# EAGLE board proxmark3 (EAGLE 5.06), part 1 of 2
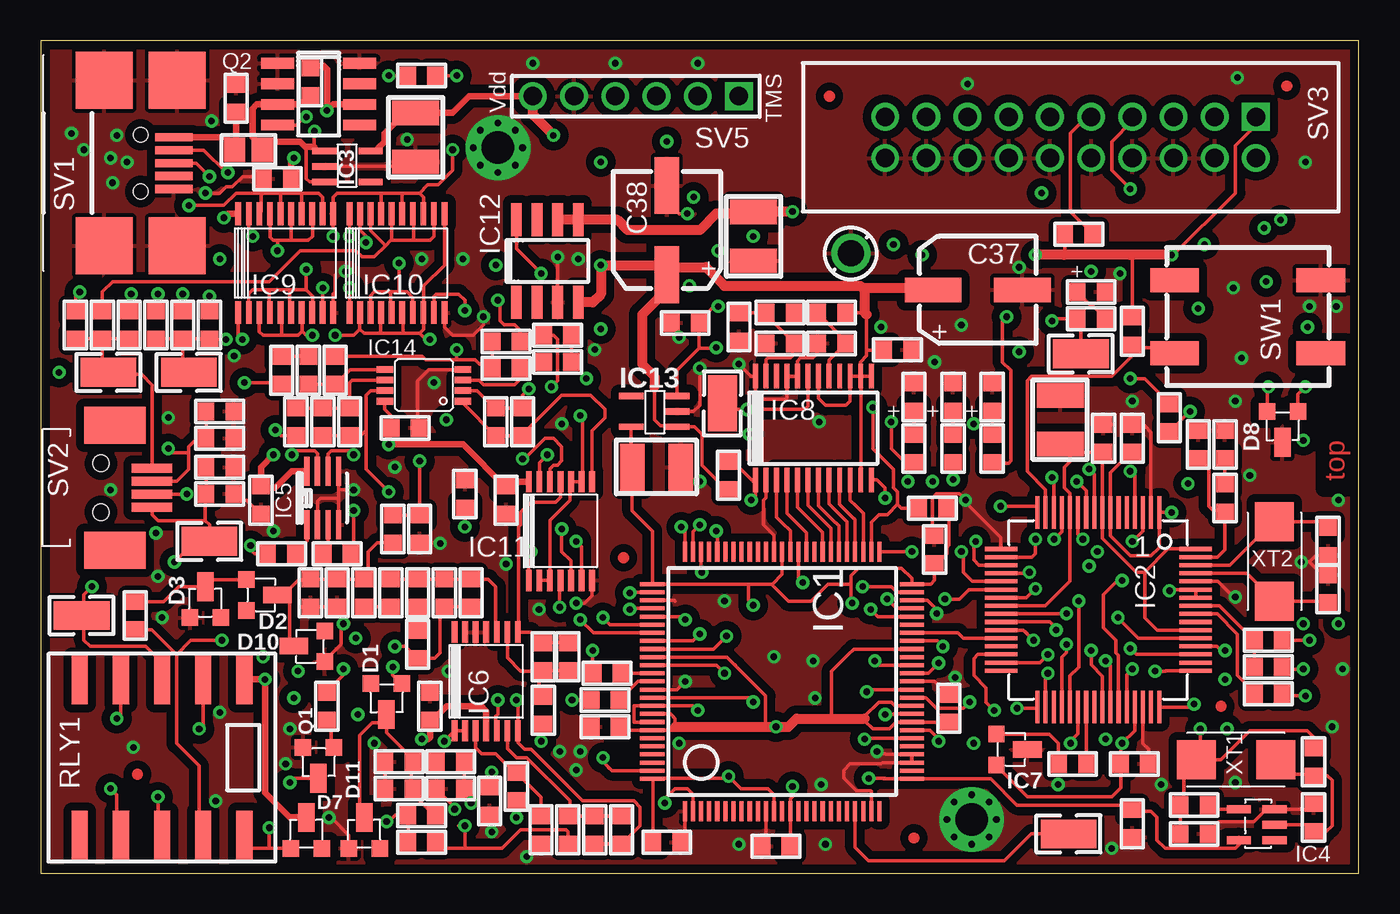
[diagram p0: board, top side]
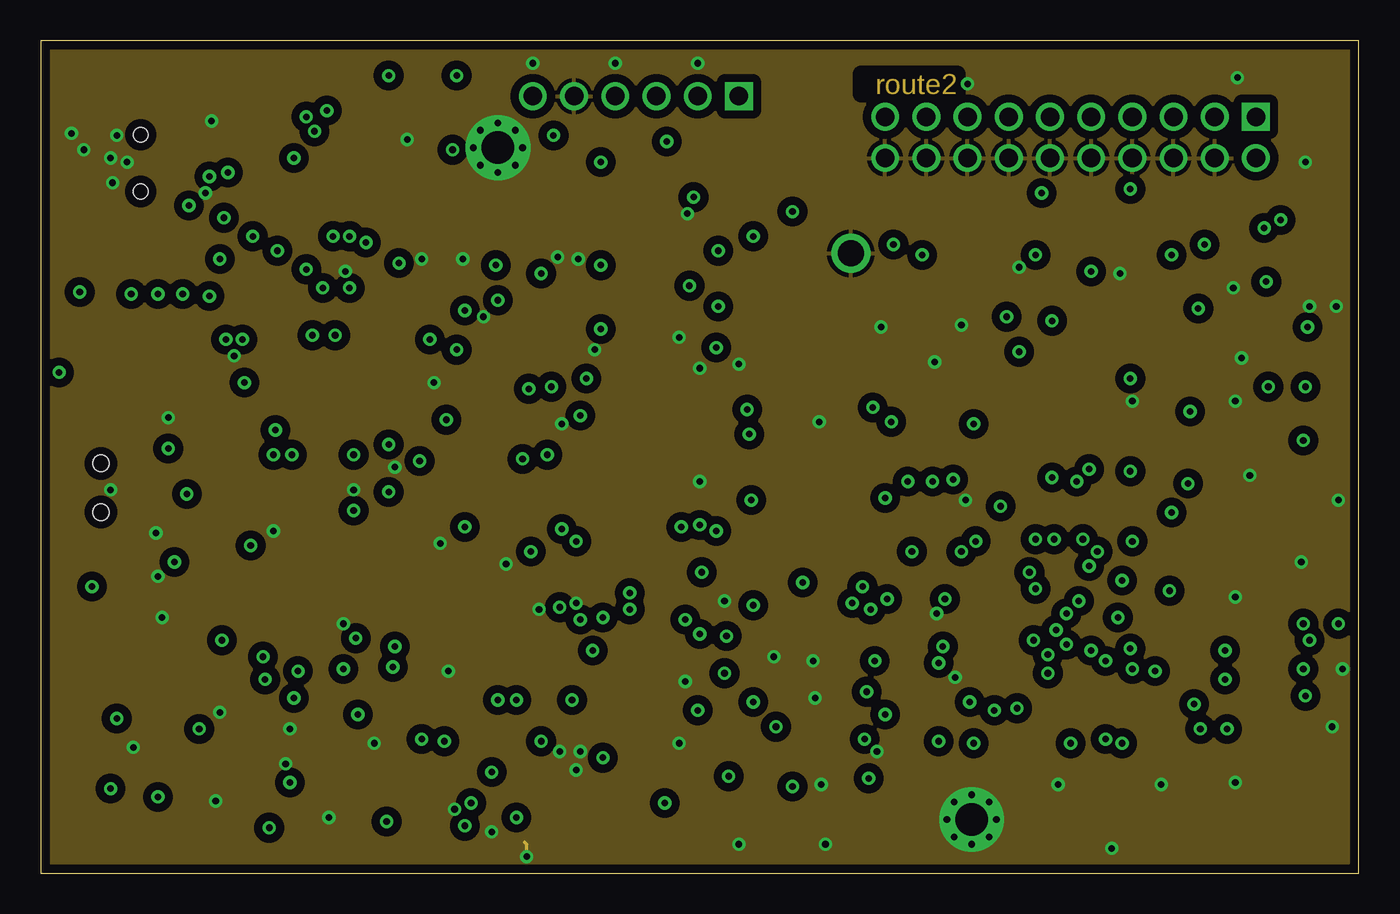
[diagram p1: board, inner layer Route2]
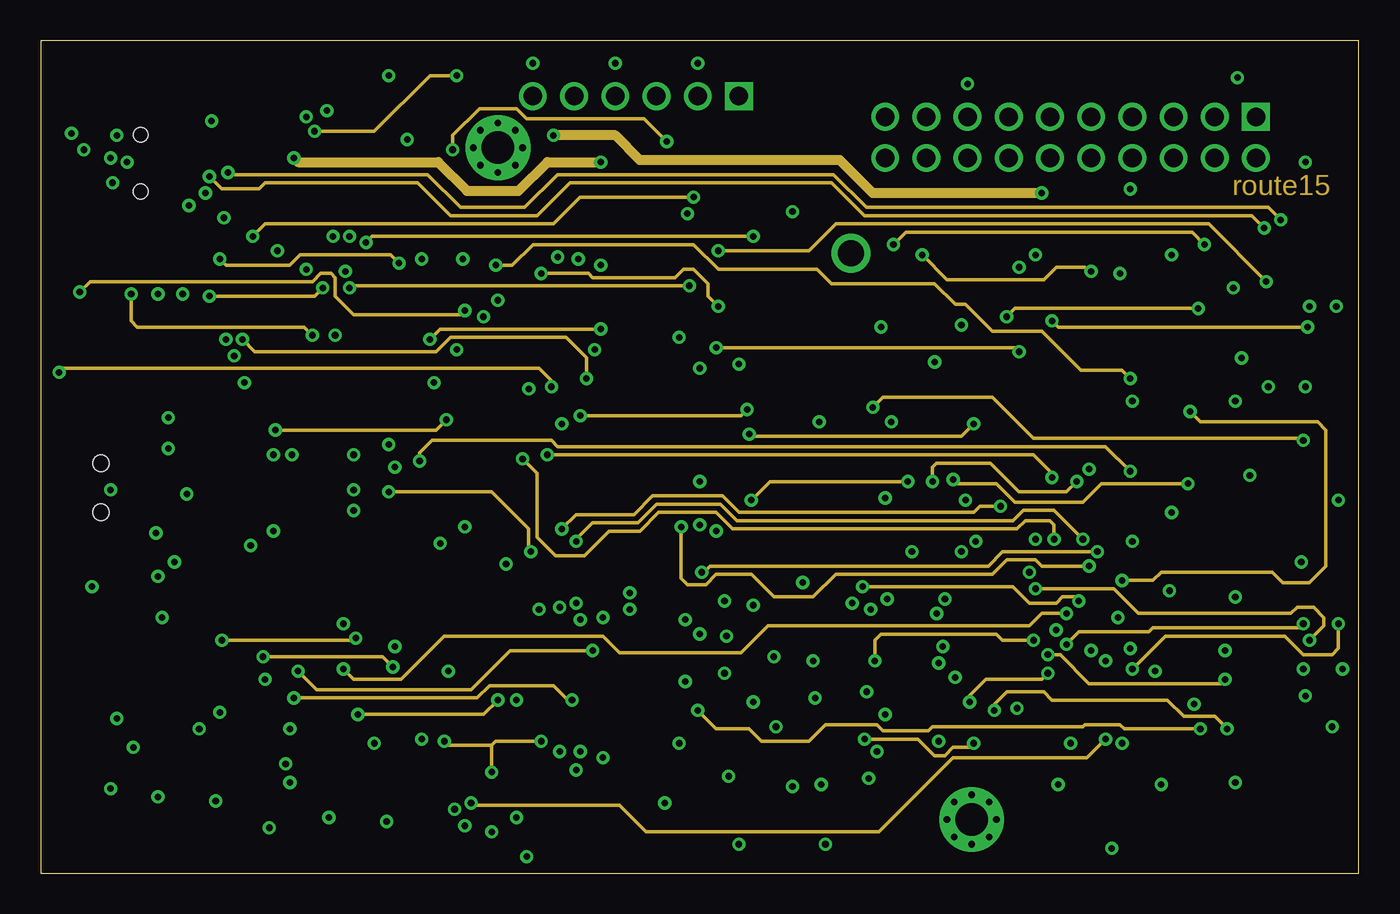
[diagram p2: board, inner layer Route15]
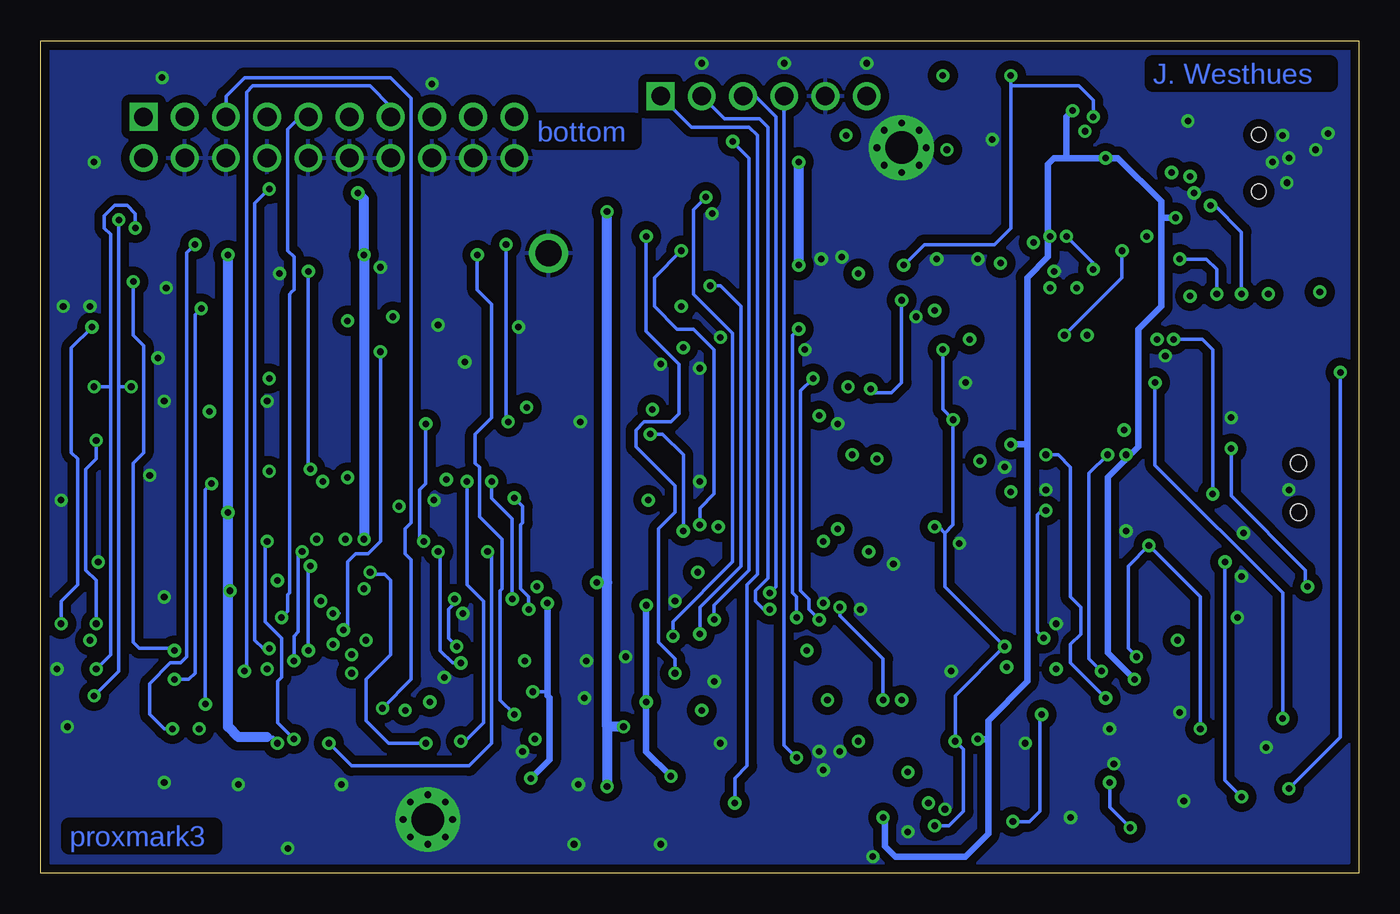
[diagram p3: board, bottom side, seen from below]

Size 81.28 x 51.31 mm. Coordinates in mm from the lower left corner, seen from the top.
Outline: 81.28,0 81.28,51.31 0,51.31 0,0 81.28,0
Copper layers (1*2*15*16): Top 0.0254mm / dielectric 0.508mm / Route2 0.0254mm / dielectric 0.508mm / Route15 0.0254mm / dielectric 0.508mm / Bottom 0.0254mm
Design rules "default *": minimum track width 8mil, minimum drill 16mil, track to track 8mil, track to pad 8mil, pad to pad 8mil, via to via 8mil, smd to smd 0mil, copper to edge 10mil, drill to drill 8mil, minimum pad ring 10mil, minimum via ring 8mil, stop-mask expansion 2mil, vias tented up to drill 16mil, thermal gap 10mil

## Footprints (pad centres in the part's own frame; a part is rotated, then mirrored left to right if it is on the bottom)
RLC_0603 = smd 1 x 1.1: 1 -0.85,0; 2 0.85,0
RLC_1210 = smd 1.5 x 2.9: 1 -1.5,0; 2 1.5,0
CAPCAITOR-ELECTROLYTIC-ALCHIP-MZA-F80 = smd 3.5 x 1.5: + 2.75,0; - -2.75,0
SOT23-3LEAD = smd 1.016 x 1.016: 1 -0.94,-0.762; 2 0.965,-0.762 | smd 1.016 x 1.778: 3 0.013,1.143
LED_0603 = smd 1 x 1.1: + -0.85,0; - 0.85,0
VQFP-100 = smd 1.25 x 0.25: 1 -8,6; 2 -8,5.5; 3 -8,5; 4 -8,4.5; 5 -8,4; 6 -8,3.5; 7 -8,3; 8 -8,2.5; 9 -8,2; 10 -8,1.5; 11 -8,1; 12 -8,0.5; 13 -8,0; 14 -8,-0.5; 15 -8,-1; 16 -8,-1.5; 17 -8,-2; 18 -8,-2.5; 19 -8,-3; 20 -8,-3.5; 21 -8,-4; 22 -8,-4.5; 23 -8,-5; 24 -8,-5.5; 25 -8,-6; 51 8,-6; 52 8,-5.5; 53 8,-5; 54 8,-4.5; 55 8,-4; 56 8,-3.5; 57 8,-3; 58 8,-2.5; 59 8,-2; 60 8,-1.5; 61 8,-1; 62 8,-0.5; 63 8,0; 64 8,0.5; 65 8,1; 66 8,1.5; 67 8,2; 68 8,2.5; 69 8,3; 70 8,3.5; 71 8,4; 72 8,4.5; 73 8,5; 74 8,5.5; 75 8,6 | smd 0.25 x 1.5: 26 -6,-8; 27 -5.5,-8; 28 -5,-8; 29 -4.5,-8; 30 -4,-8; 31 -3.5,-8; 32 -3,-8; 33 -2.5,-8; 34 -2,-8; 35 -1.5,-8; 36 -1,-8; 37 -0.5,-8; 38 0,-8; 39 0.5,-8; 40 1,-8; 41 1.5,-8; 42 2,-8; 43 2.5,-8; 44 3,-8; 45 3.5,-8; 46 4,-8; 47 4.5,-8; 48 5,-8; 49 5.5,-8; 50 6,-8; 76 6,8; 77 5.5,8; 78 5,8; 79 4.5,8; 80 4,8; 81 3.5,8; 82 3,8; 83 2.5,8; 84 2,8; 85 1.5,8; 86 1,8; 87 0.5,8; 88 0,8; 89 -0.5,8; 90 -1,8; 91 -1.5,8; 92 -2,8; 93 -2.5,8; 94 -3,8; 95 -3.5,8; 96 -4,8; 97 -4.5,8; 98 -5,8; 99 -5.5,8; 100 -6,8
LQFP-64 = smd 0.25 x 2: 1 0,0; 2 0.5,0; 3 1,0; 4 1.5,0; 5 2,0; 6 2.5,0; 7 3,0; 8 3.5,0; 9 4,0; 10 4.5,0; 11 5,0; 12 5.5,0; 13 6,0; 14 6.5,0; 15 7,0; 16 7.5,0; 33 7.5,12; 34 7,12; 35 6.5,12; 36 6,12; 37 5.5,12; 38 5,12; 39 4.5,12; 40 4,12; 41 3.5,12; 42 3,12; 43 2.5,12; 44 2,12; 45 1.5,12; 46 1,12; 47 0.5,12; 48 0,12 | smd 2 x 0.25: 17 9.75,2.25; 18 9.75,2.75; 19 9.75,3.25; 20 9.75,3.75; 21 9.75,4.25; 22 9.75,4.75; 23 9.75,5.25; 24 9.75,5.75; 25 9.75,6.25; 26 9.75,6.75; 27 9.75,7.25; 28 9.75,7.75; 29 9.75,8.25; 30 9.75,8.75; 31 9.75,9.25; 32 9.75,9.75; 49 -2.25,9.75; 50 -2.25,9.25; 51 -2.25,8.75; 52 -2.25,8.25; 53 -2.25,7.75; 54 -2.25,7.25; 55 -2.25,6.75; 56 -2.25,6.25; 57 -2.25,5.75; 58 -2.25,5.25; 59 -2.25,4.75; 60 -2.25,4.25; 61 -2.25,3.75; 62 -2.25,3.25; 63 -2.25,2.75; 64 -2.25,2.25
SOT-23-5 = smd 0.4 x 1.5: 1 -0.94,-1.422; 2 0.01,-1.422; 3 0.96,-1.422; 4 0.96,1.428; 5 -0.94,1.428
SMV-5 = smd 1.5 x 0.5: 1 0,0; 2 0,-0.95; 3 0,-1.9; 4 2.2,-1.9; 5 2.2,0
SOT-23-8-OR-MSOP-8 = smd 0.325 x 1.8: 1 -0.975,-1.65; 2 -0.325,-1.65; 3 0.325,-1.65; 4 0.975,-1.65; 5 0.975,1.65; 6 0.325,1.65; 7 -0.325,1.65; 8 -0.975,1.65
TSSOP-14 = smd 1.3 x 0.36: 1 0,0; 2 0,-0.65; 3 0,-1.3; 4 0,-1.95; 5 0,-2.6; 6 0,-3.25; 7 0,-3.9; 8 6.095,-3.9; 9 6.095,-3.25; 10 6.095,-2.6; 11 6.095,-1.95; 12 6.095,-1.3; 13 6.095,-0.65; 14 6.095,0
TSSOP-24 = smd 0.3 x 1.5: 1 -2.925,-3.2; 2 -2.275,-3.2; 3 -1.625,-3.2; 4 -0.975,-3.2; 5 -0.325,-3.2; 6 0.325,-3.2; 7 0.975,-3.2; 8 1.625,-3.2; 9 2.275,-3.2; 10 2.925,-3.2; 11 3.575,-3.2; 12 4.225,-3.2; 13 4.225,3.2; 14 3.575,3.2; 15 2.925,3.2; 16 2.275,3.2; 17 1.625,3.2; 18 0.975,3.2; 19 0.325,3.2; 20 -0.325,3.2; 21 -0.975,3.2; 22 -1.625,3.2; 23 -2.275,3.2; 24 -2.925,3.2
TSSOP-20 = smd 1.4 x 0.36: 1 0,0; 2 0,-0.65; 3 0,-1.3; 4 0,-1.95; 5 0,-2.6; 6 0,-3.25; 7 0,-3.9; 8 0,-4.55; 9 0,-5.2; 10 0,-5.85; 11 6.095,-5.85; 12 6.095,-5.2; 13 6.095,-4.55; 14 6.095,-3.9; 15 6.095,-3.25; 16 6.095,-2.6; 17 6.095,-1.95; 18 6.095,-1.3; 19 6.095,-0.65; 20 6.095,0
SOIC-8 = smd 0.66 x 2.032: 1 0,0; 2 1.27,0; 3 2.54,0; 4 3.81,0; 5 3.81,5.08; 6 2.54,5.08; 7 1.27,5.08; 8 0,5.08
MSOP8 = smd 0.41 x 1.02: 1 0,0; 2 0.65,0; 3 1.3,0; 4 1.95,0; 5 1.95,4.8; 6 1.3,4.8; 7 0.65,4.8; 8 0,4.8
TQ-SMD-RELAY = smd 1 x 3: 1 -5.08,-4.78; 2 -2.54,-4.78; 3 0,-4.78; 4 2.54,-4.78; 5 5.08,-4.78; 6 5.08,4.78; 7 2.54,4.78; 8 0,4.78; 9 -2.54,4.78; 10 -5.08,4.78
USB-MINIB-SMD = smd 2.3 x 0.5: 1 2,0.4; 2 2,-0.4; 3 2,-1.2; 4 2,-2; 5 2,-2.8 | smd 3.5 x 3.5: TAB0 -2.3,3.9; TAB1 2.2,3.9; TAB2 2.2,-6.3; TAB3 -2.3,-6.3 | hole 0.9: -0.05,0.55; -0.05,-2.95
HIROSE-MQ172-4POS = smd 0.55 x 2.5: 1 -1.2,6.75; 2 -0.4,6.75; 3 0.4,6.75; 4 1.2,6.75 | smd 2.3 x 3.8: P$1 -3.85,4.45; P$2 3.85,4.45 | hole 1: -1.5,3.6; 1.5,3.6
HEADER-MALE-10X2-0.100-SHROUDED = drill 1.143 square: 1 -1.27,11.43 | drill 1.143 round: 2 1.27,11.43; 3 -1.27,8.89; 4 1.27,8.89; 5 -1.27,6.35; 6 1.27,6.35; 7 -1.27,3.81; 8 1.27,3.81; 9 -1.27,1.27; 10 1.27,1.27; 11 -1.27,-1.27; 12 1.27,-1.27; 13 -1.27,-3.81; 14 1.27,-3.81; 15 -1.27,-6.35; 16 1.27,-6.35; 17 -1.27,-8.89; 18 1.27,-8.89; 19 -1.27,-11.43; 20 1.27,-11.43
HEADER-MALE-6X1-0.100-UNKEYED = drill 1.143 square: 1 0,6.35 | drill 1.143 round: 2 0,3.81; 3 0,1.27; 4 0,-1.27; 5 0,-3.81; 6 0,-6.35
TACTSWITCH-SMD-EVQQ1 = smd 1.5 x 3: A -2.25,4.5; B 2.25,-4.5; P$2 2.25,4.5; P$3 -2.25,-4.5
KEYSTONE-SMD-TESTPOINT-5015 = smd 3.429 x 1.778: 1 0,0
KEYSTONE-PTH-TESTPOINT-5011 = drill 1.6 round: A 0,0
RLC_0805 = smd 1.3 x 1.5: 1 -0.85,0; 2 0.85,0
XTAL-SMD-CITIZEN-CS10 = smd 2.4 x 2.4: A -0.2,0; B 4.7,0

## Placement (x,y rotation side)
C1  33n  [RLC_0603]  12.06,47.75 90 top
C2  22p  [RLC_0603]  78.49,3.43 90 top
C3  22p  [RLC_0603]  71.12,2.41 0 top
C4  33n  [RLC_0603]  73.03,26.42 270 top
C5  2n  [RLC_0603]  71.37,26.42 270 top
C6  22p  [RLC_0603]  79.38,17.53 270 top
C7  22p  [RLC_0603]  79.38,20.45 90 top
C8  1n  [RLC_0603]  65.53,26.8 90 top
C9  2u2  [RLC_1210]  62.87,27.94 90 top
C10  100n  [RLC_0603]  27.69,4.45 270 top
C11  1n  [RLC_0603]  22.1,6.86 180 top
C12  1n  [RLC_0603]  23.5,3.56 180 top
C13  dnp  [RLC_0603]  35.81,2.67 270 top
C14  22p  [RLC_0603]  5.84,15.88 90 top
C15  130p  [RLC_0603]  16.64,17.27 270 top
C16  1n  [RLC_0603]  21.59,17.27 90 top
C17  dnp  [RLC_0603]  32.51,13.34 90 top
C18  33n  [RLC_0603]  45.59,32.64 180 top
C19  33n  [RLC_0603]  48.77,32.64 180 top
C20  dnp  [RLC_0603]  11.05,28.45 0 top
C21  33n  [RLC_0603]  24,10.29 90 top
C22  33n  [RLC_0603]  22.48,27.43 0 top
C23  33n  [RLC_0603]  13.59,22.99 270 top
C24  33n  [RLC_0603]  28.7,22.99 270 top
C25  33n  [RLC_0603]  67.44,6.73 0 top
C26  33n  [RLC_0603]  67.31,26.8 90 top
C27  4u7  [RLC_1210]  23.11,45.34 270 top
C28  33n  [RLC_0603]  38.61,1.91 0 top
C29  33n  [RLC_0603]  34.8,9.02 180 top
C30  33n  [RLC_0603]  45.34,1.65 180 top
C31  33n  [RLC_0603]  56.01,10.16 90 top
C32  33n  [RLC_0603]  55.12,19.94 90 top
C33  4u7  [RLC_1210]  43.94,39.24 270 top
C34  4u7  [RLC_1210]  37.97,25.02 0 top
C35  47p  [RLC_0603]  11.05,25.02 0 top
C36  dnp  [RLC_0603]  11.05,23.37 0 top
C37  100u  [CAPCAITOR-ELECTROLYTIC-ALCHIP-MZA-F80]  57.78,35.94 180 top
C38  100u  [CAPCAITOR-ELECTROLYTIC-ALCHIP-MZA-F80]  38.61,39.62 270 top
C39  1n  [RLC_0603]  11.05,26.8 0 top
C40  dnp  [RLC_0603]  29.72,27.81 270 top
C41  dnp  [RLC_0603]  19.05,27.81 270 top
C42  1n  [RLC_0603]  31.88,33.15 0 top
C43  1n  [RLC_0603]  14.86,30.99 90 top
C44  33n  [RLC_0603]  52.83,32.26 0 top
C45  100n  [RLC_0603]  26.16,23.37 90 top
C46  33n  [RLC_0603]  14.61,42.8 180 top
C47  33n  [RLC_0603]  67.31,3.05 270 top
D1  DIODE-SMD-SOT23  [SOT23-3LEAD]  21.34,10.92 180 top
D2  DIODE-SMD-SOT23  [SOT23-3LEAD]  13.46,17.14 270 top
D3  DIODE-SMD-SOT23  [SOT23-3LEAD]  10.16,16.51 0 top
D4  LED  [LED_0603]  56.26,29.34 90 top
D5  LED  [LED_0603]  58.67,29.34 90 top
D6  LED  [LED_0603]  53.85,29.34 90 top
D7  DIODE-SMD-SOT23  [SOT23-3LEAD]  16.38,2.29 0 top
D8  DUAL-TVS-COMMON-ANODE  [SOT23-3LEAD]  76.58,27.69 180 top
D9  LED  [LED_0603]  64.77,35.81 0 top
D10  DIODE-SMD-SOT23  [SOT23-3LEAD]  16.76,13.97 90 top
D11  DIODE-SMD-SOT23  [SOT23-3LEAD]  19.94,2.29 0 top
IC1  SPARTAN-II-XC2S30-100-VQFP  [VQFP-100]  45.72,11.81 90 top
IC2  AT91SAM7S64  [LQFP-64]  68.96,22.23 180 top
IC3  PQ1X331M2ZP-3V3-LDO-SOT-23-5  [SOT-23-5]  18.92,43.56 270 top
IC4  HCU-INVERTER  [SMV-5]  76.07,2.03 180 top
IC5  TLV3502  [SOT-23-8-OR-MSOP-8]  17.4,23.11 0 top
IC6  MCP6294  [TSSOP-14]  25.53,8.76 90 top
IC7  MCP100  [SOT23-3LEAD]  59.69,7.62 270 top
IC8  TLC5540  [TSSOP-24]  46.99,27.43 0 top
IC9  74XX244-OCTAL-TRISTATE-BUFFERS  [TSSOP-20]  12.19,34.54 90 top
IC10  74XX244-OCTAL-TRISTATE-BUFFERS  [TSSOP-20]  19.05,34.54 90 top
IC11  CD4066  [TSSOP-14]  30.1,18.03 90 top
IC12  LP2989AIM-2.5  [SOIC-8]  29.34,35.18 0 top
IC13  PQ1X331M2ZP-3V3-LDO-SOT-23-5  [SOT-23-5]  37.85,28.45 90 top
IC14  AD8052  [MSOP8]  26.04,29.08 90 top
Q1  NPN-SOT23-2N3904  [SOT23-3LEAD]  17.14,6.99 180 top
Q2  IRF7307  [SOIC-8]  14.61,49.91 270 top
R1  1meg  [RLC_0603]  78.49,6.86 90 top
R2  100  [RLC_0603]  71.12,4.19 180 top
R3  330  [RLC_0603]  73.03,23.11 270 top
R4  27  [RLC_0603]  75.69,11.05 180 top
R5  27  [RLC_0603]  75.69,12.7 180 top
R6  1k5  [RLC_0603]  75.69,14.35 0 top
R7  10k  [RLC_0603]  64.01,39.37 180 top
R8  10k  [RLC_0603]  63.63,6.73 0 top
R9  100k  [RLC_0603]  29.34,5.33 270 top
R10  100k  [RLC_0603]  30.86,2.67 90 top
R11  510k  [RLC_0603]  22.1,5.21 0 top
R12  100k  [RLC_0603]  23.5,1.91 180 top
R13  10k  [RLC_0603]  32.51,2.67 90 top
R14  10k  [RLC_0603]  34.16,2.67 270 top
R15  10k  [RLC_0603]  18.29,17.27 90 top
R16  zerohm  [RLC_0603]  19.94,17.27 270 top
R17  10k  [RLC_0603]  24.89,17.27 90 top
R18  10k  [RLC_0603]  30.99,13.34 90 top
R19  10k  [RLC_0603]  30.99,10.03 90 top
R20  240k  [RLC_0603]  14.86,19.68 0 top
R21  24k  [RLC_0603]  18.29,19.68 180 top
R22  33  [RLC_0603]  5.46,33.78 270 top
R23  1k  [RLC_0603]  39.75,33.91 0 top
R24  330  [RLC_0603]  56.26,26.16 90 top
R25  330  [RLC_0603]  58.67,26.16 90 top
R26  330  [RLC_0603]  53.85,26.16 90 top
R27  33  [RLC_0603]  7.11,33.78 270 top
R28  33  [RLC_0603]  3.81,33.78 270 top
R29  33  [RLC_0603]  8.76,33.78 270 top
R30  10meg  [RLC_0603]  25.27,6.86 0 top
R31  240k  [RLC_0603]  25.27,5.21 0 top
R32  zerohm  [RLC_0603]  16.51,30.99 270 top
R33  2k4  [RLC_0603]  28.07,27.81 270 top
R34  10k  [RLC_0603]  17.4,27.81 270 top
R35  zerohm  [RLC_0603]  31.88,31.5 180 top
R36  dnp  [RLC_0603]  26.54,17.27 90 top
R37  dnp  [RLC_0603]  23.24,17.27 270 top
R38  dnp  [RLC_0603]  23.24,14.1 90 top
R39  1k  [RLC_0603]  34.92,12.32 0 top
R40  10k  [RLC_0603]  17.65,10.29 270 top
R41  10meg  [RLC_0603]  21.72,21.21 90 top
R42  1meg  [RLC_0603]  23.37,21.21 90 top
R43  1k  [RLC_0603]  67.31,33.4 90 top
R44  1k  [RLC_0603]  34.8,10.67 0 top
R45  10k  [RLC_0603]  10.41,33.78 270 top
R46  10k  [RLC_0603]  2.16,33.78 270 top
R47  10k  [RLC_0603]  42.42,24.51 90 top
R48  dnp  [RLC_0603]  18.16,30.99 270 top
R49  2k4  [RLC_0603]  28.7,31.11 0 top
R50  10k  [RLC_0603]  15.75,27.81 90 top
R51  2k4  [RLC_0603]  28.7,32.77 0 top
R52  100  [RLC_0603]  48.77,34.54 0 top
R53  330  [RLC_0603]  45.59,34.54 0 top
R54  100  [RLC_0603]  43.05,33.66 90 top
R55  330  [RLC_0603]  64.77,34.16 0 top
R56  10k  [RLC_0603]  23.5,49.15 0 top
R57  10k  [RLC_0603]  69.6,28.07 90 top
R58  dnp  [RLC_0603]  16.64,48.77 270 top
R59  3k3  [RLC_0603]  54.99,22.48 0 top
RLY1  RELAY-DPDT  [TQ-SMD-RELAY]  7.49,7.11 180 top
SV1  USB-MINIB  [USB-MINIB-SMD]  6.22,44.96 0 top
SV2  HIROSE-MQ172-4POS  [HIROSE-MQ172-4POS]  0.13,23.75 270 top
SV3  JTAG  [HEADER-MALE-10X2-0.100-SHROUDED]  63.5,45.34 270 top
SV5  HEADER-MALE-6X1  [HEADER-MALE-6X1-0.100-UNKEYED]  36.7,47.88 270 top
SW1  TACTSWITCH  [TACTSWITCH-SMD-EVQQ1]  74.42,34.29 270 top
TP1  TESTPADKEYSTONE-SMD  [KEYSTONE-SMD-TESTPOINT-5015]  42.04,28.96 90 top
TP2  TESTPADKEYSTONE-SMD  [KEYSTONE-SMD-TESTPOINT-5015]  2.54,15.88 180 top
TP3  TESTPADKEYSTONE-SMD  [KEYSTONE-SMD-TESTPOINT-5015]  10.41,20.45 180 top
TP4  TESTPADKEYSTONE-SMD  [KEYSTONE-SMD-TESTPOINT-5015]  9.14,30.86 180 top
TP5  TESTPADKEYSTONE-SMD  [KEYSTONE-SMD-TESTPOINT-5015]  4.19,30.86 180 top
TP6  TESTPADKEYSTONE-PTH  [KEYSTONE-PTH-TESTPOINT-5011]  49.95,38.19 45 top
TP7  TESTPADKEYSTONE-SMD  [KEYSTONE-SMD-TESTPOINT-5015]  63.37,2.41 180 top
TP8  TESTPADKEYSTONE-SMD  [KEYSTONE-SMD-TESTPOINT-5015]  64.14,32 180 top
U1  FERRITE0805  [RLC_0805]  12.83,44.58 0 top
XT1  XTAL-SMD-CITIZEN-CS10  [XTAL-SMD-CITIZEN-CS10]  75.95,6.99 180 top
XT2  XTAL-SMD-CITIZEN-CS10  [XTAL-SMD-CITIZEN-CS10]  76.07,21.46 270 top

## Library data of the parts
C1-C47 D1-D11 IC1-IC14 Q1 Q2 R1-R59 RLY1 SV1-SV3 SV5 SW1 TP1-TP8 U1 XT1 XT2 =   merged

## Nets
+2V5: C29.1 C30.1 C31.1 C33.1 IC1.14 IC1.33 IC1.35 IC1.42 IC1.61 IC1.85 IC1.92 IC1.94 IC12.5 IC12.6
+3V3: C25.1 C26.1 C27.1 IC2.1 IC2.7 IC2.18 IC2.45 IC2.58 IC2.59 IC3.5 IC7.2 R7.2 R43.2 SV3.1 SV5.6
+3V3-FPGA: C28.1 C32.1 C34.1 C47.1 IC1.12 IC1.26 IC1.37 IC1.50 IC1.63 IC1.76 IC1.90 IC1.100 IC4.5 IC13.5 R59.2
ADC1: IC1.62 IC8.3
ADC2: IC1.60 IC8.4
ADC3: IC1.58 IC8.5
ADC4: IC1.57 IC8.6
ADC5: IC1.56 IC8.7
ADC6: IC1.55 IC8.8
ADC7: IC1.54 IC8.9
ADC8: IC1.53 IC8.10
ADC_CLK: IC1.46 IC8.12
ADC_IN: IC8.19 IC11.2 IC11.3 IC11.9 IC11.10 TP1.1
ADC_NOE: IC1.47 IC8.1 R47.2
ADCDR_HI: C17.2 IC6.8 IC11.11 R18.2
ADCDR_LO: C13.2 IC6.7 IC11.4 R14.2
AMPL_HI: IC2.4 R41.2 R42.2
AMPL_LO: IC2.3 R30.2 R31.2
ANT_HI: C35.1 C36.1 RLY1.8 SV2.4 TP3.1
ANT_LO: C20.1 C39.1 RLY1.3 SV2.2 TP2.1
ARM_TCK: IC2.53 R7.1 SV3.9
ARM_TDI: IC2.33 SV3.5
ARM_TDO: IC2.49 SV3.13
ARM_TMS: IC2.51 SV3.7
BUTTON_A: IC2.15 R43.1 SW1.B
CROSS_HI: IC5.6 R44.1
CROSS_LO: IC5.7 R39.1
FPGA_CCLK: IC1.75 IC2.41
FPGA_DIN: IC1.73 IC2.42
FPGA_DONE: IC1.49 IC2.37
FPGA_DOUT: IC1.74 IC2.52
FPGA_NINIT: IC1.52 IC2.36 R59.1
FPGA_NPROGRAM: IC1.51 IC2.38
FPGA_ON: IC2.26 IC12.8 IC13.3 R23.2
FPGA_TCK: IC1.99 SV5.4
FPGA_TDI: IC1.79 SV5.2
FPGA_TDO: IC1.77 SV5.3
FPGA_TMS: IC1.2 SV5.1
GND: C1.2 C2.2 C3.2 C4.1 C5.1 C6.1 C7.1 C8.2 C9.2 C10.2 C11.2 C15.2 C18.2 C19.2 C20.2 C21.2 C22.2 C23.2 C24.2 C25.2 C26.2 C27.2 C28.2 C29.2 C30.2 C31.2 C32.2 C33.2 C34.2 C35.2 C36.2 C37.- C38.- C39.2 C44.2 C45.2 C46.2 C47.2 D3.1 D4.- D5.- D6.- D8.3 D9.- D10.1 D11.1 IC1.1 IC1.11 IC1.24 IC1.28 IC1.29 IC1.38 IC1.48 IC1.64 IC1.78 IC1.89 IC2.2 IC2.17 IC2.46 IC2.60 IC3.2 IC4.3 IC5.2 IC5.4 IC5.5 IC6.11 IC6.12 IC6.13 IC7.3 IC8.2 IC8.20 IC8.21 IC8.24 IC9.10 IC10.10 IC11.7 IC12.3 IC13.2 IC14.4 Q1.2 Q2.1 Q2.2 Q2.8 R10.1 R11.1 R15.1 R23.1 R31.1 R42.1 R54.1 SV1.5 SV1.TAB0 SV1.TAB1 SV1.TAB2 SV1.TAB3 SV3.4 SV3.6 SV3.8 SV3.10 SV3.12 SV3.14 SV3.16 SV3.18 SV3.20 SV5.5 SW1.A TP6.A
LED_A: IC2.48 R24.1
LED_B: IC2.31 R25.1
LED_C: IC2.30 R26.1
LED_D: IC2.44 R55.1 TP8.1
MISO: IC1.40 IC2.27
MOSI: IC1.43 IC2.22
MUXSEL_HIPKD: IC2.13 IC11.12
MUXSEL_HIRAW: IC2.11 IC11.6
MUXSEL_LOPKD: IC2.16 IC11.5
MUXSEL_LORAW: IC2.14 IC11.13
N$1: C1.1 SV1.1 U1.1
N$2: C5.2 IC2.63 R3.2
N$3: IC4.4 R2.1
N$4: C2.1 IC4.2 R1.1 XT1.A
N$5: C3.1 IC1.91 IC1.93 R1.2 R2.2 XT1.B
N$6: C4.2 R3.1
N$7: C6.2 IC2.61 XT2.B
N$8: C7.2 IC2.62 XT2.A
N$9: IC2.39 R8.2
N$10: C8.1 C9.1 IC2.8 IC2.12 IC2.24 IC2.54 IC2.64
N$11: IC2.56 R4.2
N$12: IC2.57 R5.2 R6.1
N$13: IC7.1 R8.1
N$14: IC6.3 R9.1 R10.2
N$15: C17.1 IC6.9 R18.1 R19.2
N$16: C12.2 IC6.5 R12.2
N$17: C13.1 IC6.6 R13.2 R14.1
N$18: C16.1 R16.2
N$19: C11.1 C12.1 D1.3 D11.3 R11.2 R30.1
N$20: C14.2 D2.1 D3.3
N$21: C15.1 D2.3 D10.3 R15.2 R16.1 R41.1
N$22: C16.2 IC6.10 R17.2 R36.2 R37.1
N$23: IC5.1 R20.2
N$24: C18.1 IC8.23 R53.1 R54.2
N$25: D9.+ R55.2
N$26: IC5.3 R21.2
N$27: IC1.87 R39.2
N$28: D6.+ R26.2
N$29: D5.+ R25.2
N$30: D4.+ R24.2
N$31: R27.2 R29.2 R45.2 SV2.3 TP4.1
N$32: R22.2 R28.2 R46.2 SV2.1 TP5.1
N$33: IC9.12 IC9.14 IC9.16 IC9.18 R27.1
N$34: IC10.12 IC10.14 IC10.16 IC10.18 R28.1
N$35: D7.1 Q1.3 RLY1.10
N$36: C14.1 R21.1 RLY1.9
N$37: C42.1 RLY1.7
N$38: Q1.1 R40.2
N$39: D1.1 R20.1 RLY1.2
N$40: IC1.88 R44.2
N$41: IC9.3 IC9.5 IC9.7 R22.1
N$42: IC10.3 IC10.5 IC10.7 R29.1
N$43: C41.2 IC11.1 IC14.7 R34.2
N$44: IC9.9 R45.1
N$45: IC10.9 R46.1
N$46: C43.1 RLY1.4
N$47: IC14.3 R35.2 R49.2
N$48: C19.1 IC8.17 R52.1 R53.2
N$49: IC3.1 IC3.3 Q2.3 R56.2 R58.2 U1.2
N$50: C43.2 R32.1
N$51: C42.2 R35.1
N$52: C40.1 IC14.2 R33.1 R51.2
N$53: C41.1 IC14.6 R34.1 R50.2
N$54: IC14.5 R32.2 R48.2
N$55: IC1.22 TP7.1
N$56: R37.2 R38.2
NCS: IC1.44 IC2.28
NVDD_ON: IC2.43 R57.1
PCK0: IC1.36 IC2.34
PFETGATE: Q2.4 R56.1 R57.2
PWR_HI: IC1.80 IC9.2 IC9.4 IC9.6 IC9.8 IC9.11 IC10.13 IC10.15 IC10.17
PWR_LO: IC1.81 IC9.13 IC9.15 IC9.17 IC10.2 IC10.4 IC10.6 IC10.8 IC10.11
PWR_OE1: IC1.82 IC9.1
PWR_OE2: IC1.83 IC10.1
PWR_OE3: IC1.84 IC9.19
PWR_OE4: IC1.86 IC10.19
RAW_HI: C40.2 IC11.8 IC14.1 R33.2
RELAY_ON: IC2.25 R40.1
SPCK: IC1.39 IC2.21
SSP_CLK: IC1.71 IC2.19
SSP_DIN: IC1.32 IC2.10
SSP_DOUT: IC1.34 IC2.9
SSP_FRAME: IC1.31 IC2.20
USB_D+: D8.1 R5.1 SV1.3
USB_D-: D8.2 R4.1 SV1.2
USB_PU: IC2.23 R6.2
VDD: C21.1 C22.1 C23.1 C24.1 C37.+ C38.+ C44.1 C46.1 D7.3 IC5.8 IC6.4 IC8.11 IC8.13 IC8.14 IC8.15 IC8.18 IC9.20 IC10.20 IC11.14 IC12.4 IC13.1 IC14.8 Q2.6 R9.2 R47.1 R52.2 R58.1 RLY1.1
VMID: C10.1 C45.1 IC6.1 IC6.2 R12.1 R13.1 R17.1 R19.1 R36.1 R38.1 R48.1 R49.1 R50.1 R51.1